# EAGLE board USB_to_MBUS (EAGLE 9.6.2)
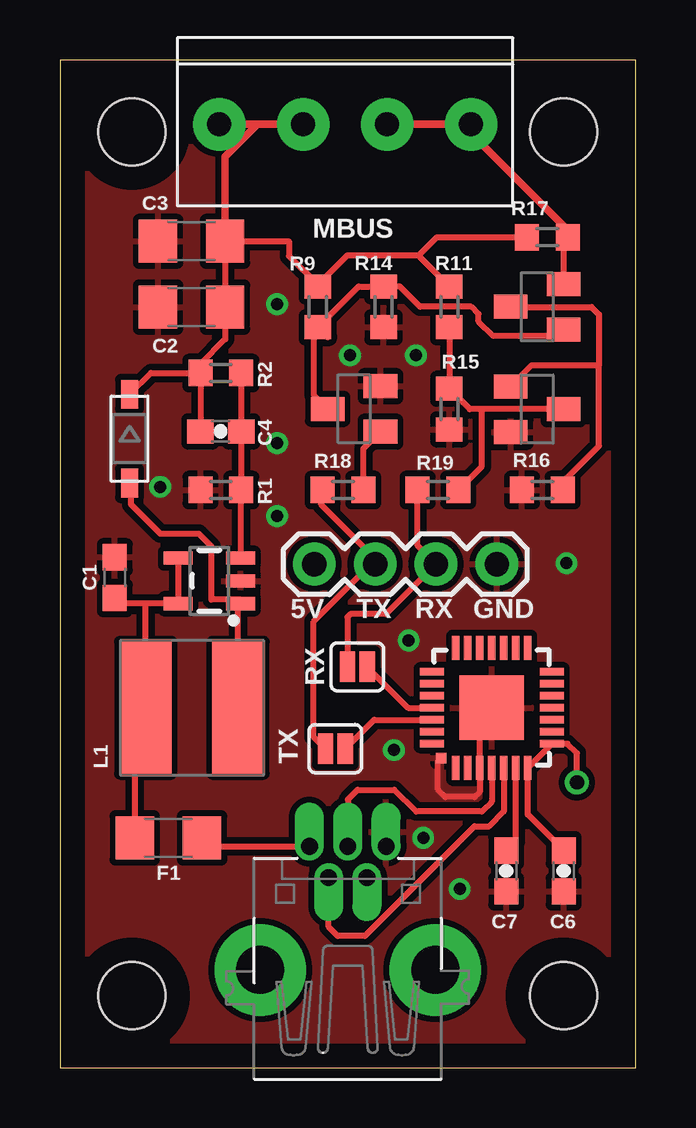
[diagram p0: board, top side]
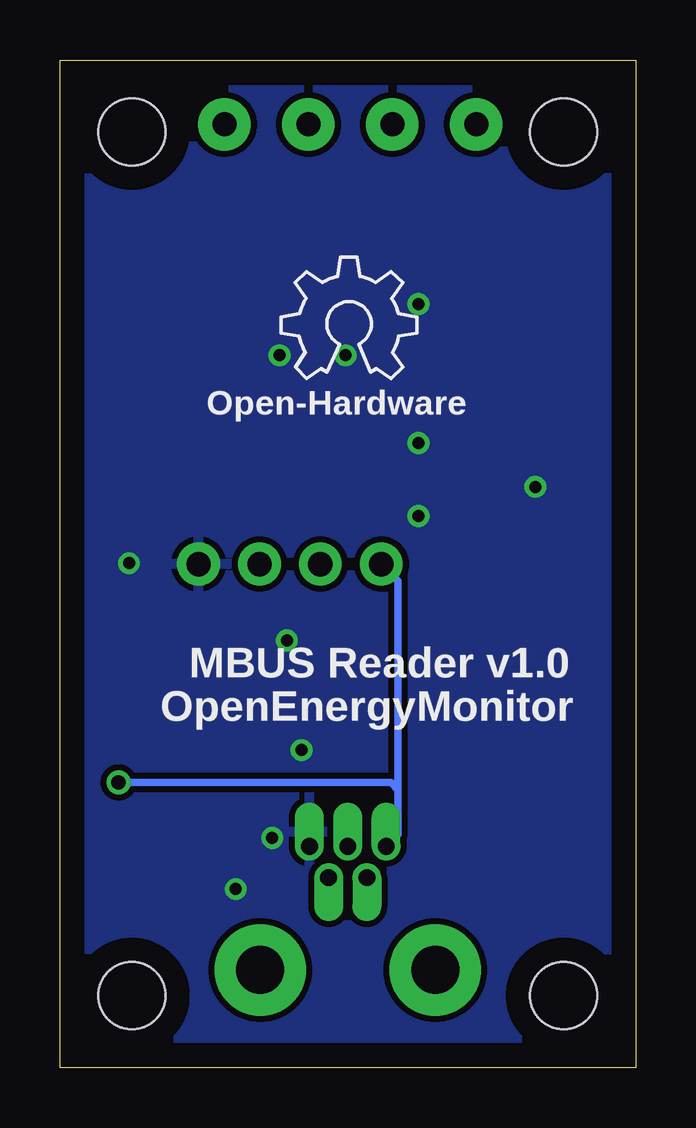
[diagram p1: board, bottom side, seen from below]

Size 24 x 42 mm. Coordinates in mm from the lower left corner, seen from the top.
Outline: 24,0 24,42 0,42 0,0 24,0
Copper layers (1*16): Top 0.035mm / dielectric 1.5mm / Bottom 0.035mm
Design rules "default *": minimum track width 8mil, minimum drill 24mil, track to track 8mil, track to pad 8mil, pad to pad 8mil, via to via 8mil, smd to smd 8mil, copper to edge 40mil, drill to drill 8mil, minimum pad ring 10mil, minimum via ring 8mil, stop-mask expansion 0.075mm, vias tented up to drill 0.6mm, thermal gap 10mil
Net classes: 0 default: width 0.203 mm, drill 0.6 mm, clearance 0.203 mm; 1 power: width 0.381 mm, drill 0.6 mm, clearance 0.254 mm; 2 gnd: width 0.254 mm, drill 0.6 mm, clearance 0.254 mm; 3 thin_power2: width 0.254 mm, clearance 0.254 mm
Holes 2.8 mm at 3,3 3,39 21,39 21,3

## Footprints (pad centres in the part's own frame; a part is rotated, then mirrored left to right if it is on the bottom)
USB-MINIB-THM-MOLEX = drill 0.7 offset: D+ 0,9.72; D- -0.8,8.42; GND 1.6,9.72; ID 0.8,8.42; VBUS -1.6,9.72 | drill 2 pad 3.81: GND1 -3.65,4.57; GND4 3.65,4.57
0603 = smd 1.1 x 1: 1 -0.85,0; 2 0.85,0
1206 = smd 1.6 x 1.8: 1 -1.4,0; 2 1.4,0
0603-CAP = smd 1.1 x 1: 1 -0.85,0; 2 0.85,0
1X04-BIG = drill 1.016 pad 1.778: 1 0,0; 2 2.54,0; 3 5.08,0; 4 7.62,0
1X04-3.5MM = drill 1 pad 2.184: 1 -5.25,0; 2 -1.75,0; 3 1.75,0; 4 5.25,0
SOD-123 = smd 1.2 x 0.7: A 1.85,0; C -1.85,0
MLP28 = smd 1 x 0.3: 1 -2.5,1.5; 2 -2.5,1; 3 -2.5,0.5; 4 -2.5,0; 5 -2.5,-0.5; 6 -2.5,-1; 7 -2.5,-1.5; 15 2.5,-1.5; 16 2.5,-1; 17 2.5,-0.5; 18 2.5,0; 19 2.5,0.5; 20 2.5,1; 21 2.5,1.5 | smd 0.3 x 1: 8 -1.5,-2.5; 9 -1,-2.5; 10 -0.5,-2.5; 11 0,-2.5; 12 0.5,-2.5; 13 1,-2.5; 14 1.5,-2.5; 22 1.5,2.5; 23 1,2.5; 24 0.5,2.5; 25 0,2.5; 26 -0.5,2.5; 27 -1,2.5; 28 -1.5,2.5 | smd 2.7 x 2.7: EXP 0,0 | smd 0.435 x 0.435: M -2.103,2.103
CR54 = smd 5.5 x 2.15: P$1 0,1.92; P$2 0,-1.92
SOT23-BEC = smd 1 x 1.4: B -0.95,-1.1; C 0,1.1; E 0.95,-1.1
R0603 = smd 1 x 1.1: 1 -0.85,0; 2 0.85,0
SJ_2S = smd 0.635 x 1.27: 1 -0.412,0; 2 0.412,0
SOT-23-5 = smd 0.55 x 1.2: 1 -0.95,-1.3; 2 0,-1.3; 3 0.95,-1.3; 4 0.95,1.3; 5 -0.95,1.3

## Placement (x,y rotation side)
5VUSB  [USB-MINIB-THM-MOLEX]  12,-0.5 0 top
C1  4.7uF  [0603]  2.29,20.42 90 top
C2  10u  [1206]  5.49,31.7 180 top
C3  1u  [1206]  5.49,34.44 180 top
C4  10pF  [0603-CAP]  6.71,26.52 0 top
C6  100nF  [0603-CAP]  21,8.2 270 top
C7  100nF  [0603-CAP]  18.61,8.2 270 top
CN1  1X4-BIG  [1X04-BIG]  18.22,20.99 180 top
CN2  1X4-3.5MM  [1X04-3.5MM]  11.89,39.32 180 top
D1  SS14  [SOD-123]  2.9,26.21 270 top
F1  6V/0.5A  [1206]  4.52,9.57 180 top
IC2  CP210X_USB_UART  [MLP28]  18,15 90 top
L1  10uH  [CR54]  5.5,15 90 top
LOGO1  OSHW_LOGO_6MILX0200-NT  [OSHW_6X200_NOTEXT]  14.79,28.71 0 bottom
Q1  [SOT23-BEC]  12.26,27.46 90 top
Q2  [SOT23-BEC]  19.89,27.44 270 top
R1  37k  [R0603]  6.71,24.08 0 top
R2  1M  [R0603]  6.71,28.96 180 top
R9  39k  [R0603]  10.75,31.71 90 top
R11  33k  [R0603]  16.24,31.71 90 top
R14  22k  [R0603]  13.49,31.71 90 top
R15  3k3  [R0603]  16.24,27.44 90 top
R16  82r  [R0603]  20.12,24.08 0 top
R17  220k  [R0603]  20.32,34.61 180 top
R18  1k  [R0603]  11.8,24.08 180 top
R19  1k  [R0603]  15.76,24.08 180 top
RX_LINK1  SOLDERJUMPERNC  [SJ_2S]  12.4,16.7 180 top
T1  [SOT23-BEC]  19.89,31.71 90 top
TX_LINK  SOLDERJUMPERNC  [SJ_2S]  11.48,13.29 180 top
U2  AP3015  [SOT-23-5]  6.23,20.28 90 top

## Library data of the parts
5VUSB CN1 CN2 D1 = adafruit
C1 = SparkFun-Capacitors; PROD_ID: CAP-00868
C2 C3 = SparkFun-Capacitors; PROD_ID: CAP-09822
C4 C6 C7 L1 RX_LINK1 TX_LINK = SparkFun
F1 = SparkFun-Fuses; PROD_ID: RES-08585
IC2 = SparkFun-DigitalIC
LOGO1 = ohw-logo
Q1 Q2 T1 = transistor
R1 R2 R9 R11 R14-R19 = rcl
U2 = dword1511-pmic-dcdc

## Nets
5V: C1.1 F1.2 L1.P$1 U2.4 U2.5
5V1 [power]: 5VUSB.VBUS C6.1 CN1.4 F1.1 IC2.7 IC2.8
24V: C2.1 C3.1 C4.1 CN2.3 CN2.4 D1.C R2.2 R9.2 R11.2 R17.2
D+: 5VUSB.D+ IC2.4
D-: 5VUSB.D- IC2.5
DTR: IC2.28
GND [power]: 5VUSB.GND C1.2 C2.2 C3.2 C6.2 C7.2 CN1.1 IC2.3 IC2.EXP IC2.M Q1.E Q2.E R1.1 R14.1 R15.1 R16.1 U2.2
N$1: C7.1 IC2.6
N$4: C4.2 R1.2 R2.1 U2.3
N$5: D1.A L1.P$2 U2.1
N$10: IC2.26 TX_LINK.1
N$11: IC2.25 RX_LINK1.1
N$13: CN2.1 CN2.2 R17.1 T1.E
N$16: Q2.B R16.2 T1.C
N$18: Q1.C R9.1 R14.2 T1.B
N$21: Q2.C R11.1 R15.2 R19.1
N$25: Q1.B R18.1
RXD: CN1.2 R19.2 RX_LINK1.2
TXD: CN1.3 R18.2 TX_LINK.2

## Tracks (layer width: path | path; a pad name or v marks a point on that pad's centre or on a via)
5V
  Top 0.254: U2.4 U2.5 3.58,19.34 | 3.58,19.34 2.53,19.34 C1.1 | 3.58,19.34 L1.P$1 3.12,14.54 F1.2
5V1  (via drill 0.6)
  Top 0.254: F1.1 6.27,9.22 5VUSB.VBUS | C6.1 19.5,10.54 IC2.7 IC2.8 21.16,13.5 21.55,13.11 v21.55,11.89
  Bottom 0.305: v21.55,11.89 10.21,11.89 9.9,11.58 | 9.9,11.58 9.9,20.29 CN1.4 | 9.9,11.58 9.9,9.72 5VUSB.VBUS
24V
  Top 0.254: R11.2 14.95,33.85 | 14.95,33.85 11.97,33.85 10.75,32.63 | 10.75,32.63 R9.2 | 10.75,32.63 9.54,33.83 9.54,34.44 C3.1 C2.1 6.89,30.36 5.86,29.32 R2.2 | 14.95,33.85 15.72,34.61 R17.2 | R2.2 C4.1 | D1.C 3.79,28.96 R2.2
  Top 0.305: CN2.4 8.23,39.32 | 8.23,39.32 CN2.3 | C3.1 6.89,37.98 8.23,39.32
D+
  Top 0.254: IC2.4 18,11.07 17.59,10.67 14.85,10.67 13.94,11.58 12.41,11.58 12,11.17 5VUSB.D+
D-
  Top 0.254: IC2.5 18.5,10.68 17.9,10.06 17.29,10.06 12.72,5.49 11.58,5.49 11.2,5.87 5VUSB.D-
GND  (via drill 0.5)
  Top 0.254: IC2.EXP 17.5,14.5 IC2.3 17.5,11.49 17.29,11.28 16.07,11.28 15.76,11.58 15.76,12.76 IC2.M
  other vias: 21.12,21.02 15.15,9.57 13.93,13.23 16.67,7.44 14.54,17.8 4.17,24.2 9.05,26.03 9.05,31.82 9.05,22.99 12.1,29.69 14.84,29.69
  pour Bottom (isolate 0.254): 0,0 24,0 24,42 0,42
  pour Top (isolate 0.254): 0,0 24,0 24,42 0,42
N$1
  Top 0.254: IC2.6 19,9.44 C7.1
N$4
  Top 0.254: U2.3 7.47,21.29 7.56,21.38 R1.2 C4.2 R2.1
N$5
  Top 0.254: D1.A 2.96,24.3 2.96,23.47 4.18,22.25 5.79,22.25 6.32,21.73 6.32,19.51 7.53,19.51 U2.1 7.42,19.23 L1.P$2
N$10
  Top 0.254: TX_LINK.1 13.1,14.5 IC2.26
N$11
  Top 0.254: RX_LINK1.1 14.51,15 IC2.25
N$13
  Top 0.254: 21.08,34.61 R17.1 20.99,34.43 T1.E
  Top 0.305: CN2.2 CN2.1 17.37,39.08 17.37,38.71 21.03,35.05 21.03,34.75 R17.1
N$16
  Top 0.254: T1.C 18.81,31.7 22.16,31.7 22.47,31.39 22.47,29.26 | 22.47,29.26 19.66,29.26 Q2.B | R16.2 20.89,24.33 22.47,25.91 22.47,29.26
N$18
  Top 0.254: T1.B 20.73,30.49 18.07,30.49 17.46,31.1 17.46,31.41 17.15,31.71 15.02,31.71 14.17,32.56 R14.2 12.45,32.56 R9.1 11.17,30.44 10.83,30.79 10.58,30.79 10.58,28.04 Q1.C
N$21
  Top 0.254: R11.1 R15.2 17.09,27.45 17.59,27.45 | Q2.C 17.59,27.45 | R19.1 17.59,25.06 17.59,27.45
N$25
  Top 0.254: R18.1 12.65,25.79 Q1.B
RXD
  Top 0.254: R19.2 14.91,21.75 CN1.2 13.59,18.9 12.11,18.9 11.99,18.78 RX_LINK1.2
TXD
  Top 0.254: R18.2 10.89,24.02 10.89,23.47 13.14,21.22 CN1.3 12.98,20.99 10.58,18.59 10.58,13.78 TX_LINK.2

## Text on the board
_tsilk: MBUS | 5V | TX | RX | GND | RX | TX
_bsilk: Open-Hardware | MBUS Reader v1.0 | OpenEnergyMonitor